# Altium PCB PCB1.PcbDoc (part 2 of 2)
Units mm, origin at the board's own origin, x right, y up, seen from the top; angles counter-clockwise.
Board outline 50 x 50 mm, 4 copper layers (Top Layer, GND, VCC, Bottom Layer), stack 1.991 mm thick; 34 components, 63 nets, 262 pads, 258 vias.
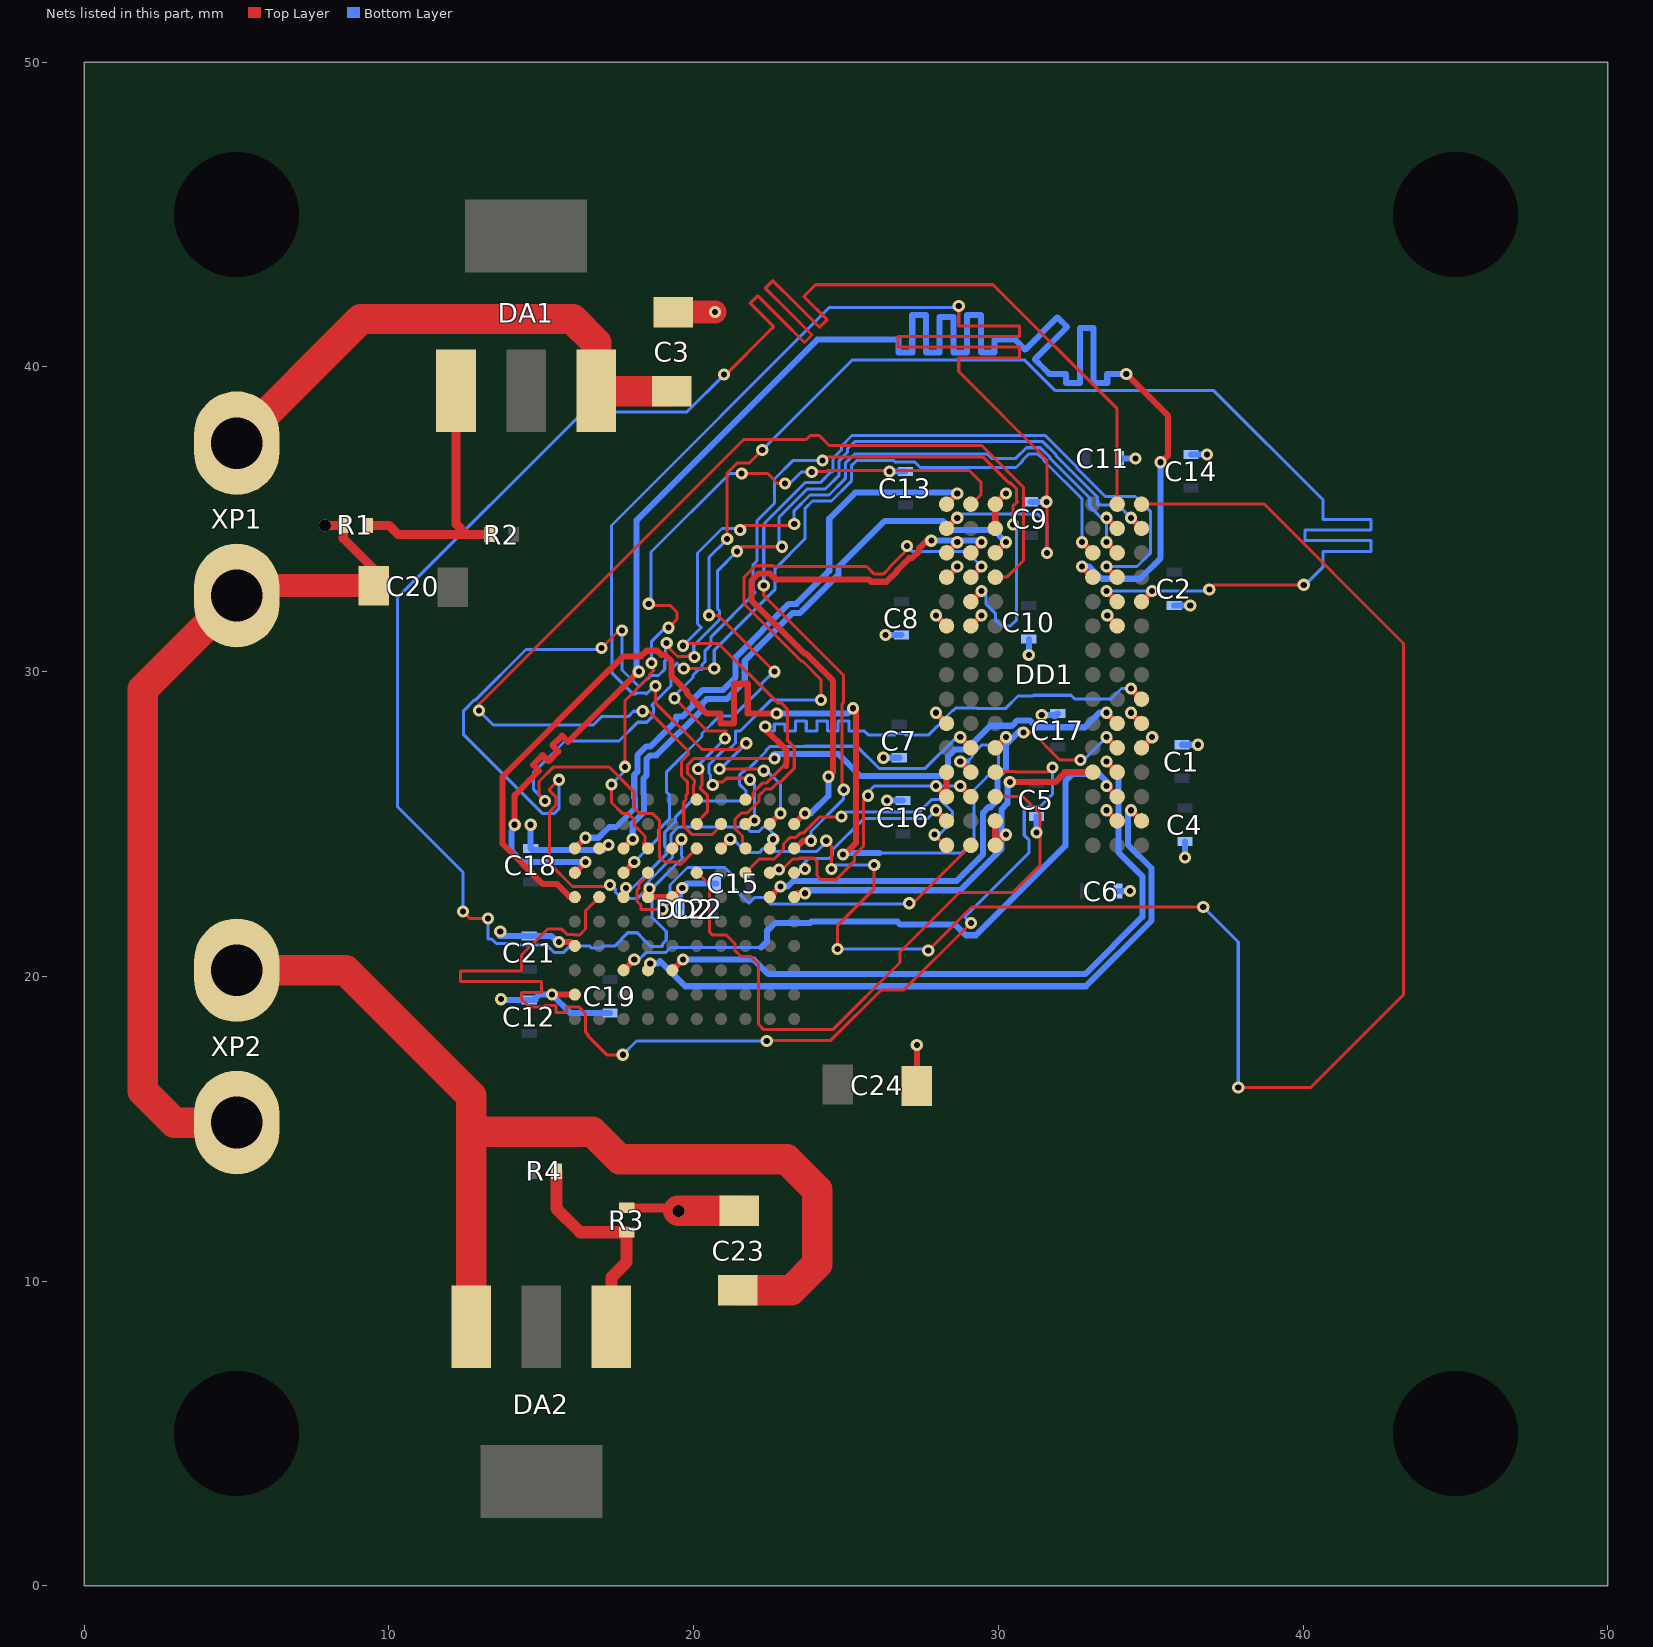
[diagram p4: the nets of this part, all layers, seen from the top]

## Via types
v1: diameter 0.4, hole 0.2, Top Layer to Bottom Layer, tented both sides, 113 vias
v2: diameter 0.4, hole 0.2, Top Layer to Bottom Layer, tented bottom, 87 vias
v3: diameter 0.4, hole 0.2, GND to Bottom Layer, tented bottom, 28 vias
v4: diameter 0.4, hole 0.2, Top Layer to GND, tented top, 14 vias
v5: diameter 0.4, hole 0.2, Top Layer to VCC, tented top, 11 vias
v6: diameter 0.4, hole 0.4, Top Layer to VCC, tented top, 2 vias
v7: diameter 0.4, hole 0.4, Top Layer to GND, tented top, 2 vias
v8: diameter 0.4, hole 0.2, Top Layer to Bottom Layer, 1 vias

## Nets (pads, with @x,y where several pads share a name; then routed paths per layer and width w, separated by ;. In a path a pad name is that pad's centre, name@x,y a point inside that pad or via, vN(x,y) a via of type N, cw(c..) or ccw(c..) an arc to the next point about the centre after c; other vN are vias at no path point) (continued)
DQ3: DD1.N8 DD2.H3 | length 21.1
  Top Layer w0.2: DD2.H3@17.7,20.2 v1(18.05,20.55) ; v1(33.55,26.25) DD1.N8@33.9,25.9
  Bottom Layer w0.1: v1(18.05,20.55) 18.205,20.55 18.431,20.776 18.721,20.776 19.077,20.776 19.251,20.95 22.216,20.95
  Bottom Layer w0.2: 22.216,20.95 22.401,21.135 22.401,21.501 22.455,21.555 22.489,21.555 22.684,21.75 23.816,21.75 23.866,21.8 26.685,21.8 26.787,21.698 28.586,21.698 28.934,21.35 29.266,21.35 32.2,24.284 32.2,26.4 32.45,26.65 33.3,26.65 33.55,26.4 v1(33.55,26.25)
DQ4: DD1.P9 DD2.H4 | length 22.5
  Top Layer w0.2: DD2.H4@18.5,20.2 18.61,20.31 18.576,20.344 v1(18.576,20.426) ; v1(34.35,25.45) DD1.P9@34.7,25.1
  Bottom Layer w0.2: v1(18.576,20.426) 18.826,20.426 18.9,20.5 19.725,19.675 32.874,19.675 35.027,21.827 35.027,23.549 34.252,24.324 34.252,25.352 v1(34.35,25.45)
DQ5: DD1.M8 DD2.H5 | length 22.6
  Top Layer w0.2: DD2.H5@19.3,20.2 v1(19.65,20.55) ; v1(33.55,27.05) DD1.M8@33.9,26.7
  Bottom Layer w0.2: v1(19.65,20.55) 21.975,20.55 22.45,20.075 32.85,20.075 34.727,21.952 34.727,23.283 33.95,24.06 33.95,26.65 v1(33.55,27.05)
DQ6: DD1.M7 DD2.E10 | length 12.6
  Top Layer w0.2: DD2.E10@23.3,22.6 23.426,22.726 v1(23.651,22.726) ; v2(30.376,26.376) 31.867,26.376 32.175,26.684 32.175,26.7 DD1.M7@33.1,26.7
  Bottom Layer w0.2: v1(23.651,22.726) 23.75,22.825 28.75,22.825 30.1,24.175 30.1,25.475 30.3,25.675 30.3,26.3 v2(30.376,26.376)
DQ7: DD1.L8 DD2.E9 | length 16.2
  Top Layer w0.1: v2@30.974,28.001 31.119,28.001 32.02,27.1 v2(32.7,27.1)
  Top Layer w0.2: DD2.E9@22.5,22.6 v1(22.85,22.95) ; v2(30.827,28.001) v2@30.974,28.001 ; v1(33.55,27.85) DD1.L8@33.9,27.5
  Bottom Layer w0.1: v2(32.7,27.1) 32.8,27.1 v1(33.55,27.85)
  Bottom Layer w0.2: v1(22.85,22.95) 23.084,22.95 23.26,23.126 24.04,23.126 24.041,23.125 28.625,23.125 29.5,24 29.5,25.375 29.675,25.55 29.74,25.55 29.976,25.786 29.976,26.542 30.25,26.815 30.25,27.599 30.726,28.076 30.801,28.001 v2(30.827,28.001)
DQ8: DD1.L2 DD2.E3 | length 15.7
  Top Layer w0.2: DD2.E3@17.7,22.6 17.783,22.683 v1(17.783,22.9) ; v1(28.75,27.85) DD1.L2@29.1,27.5
  Bottom Layer w0.1: v1(17.783,22.9) 17.992,22.9 19.1,24.008 19.1,24.224 19.051,24.273 19.051,24.729 19.373,25.051 ; 19.373,25.051 19.4,25.078 19.4,25.225 19.925,25.75 21.525,25.75 21.725,25.95 21.725,26.082 21.501,26.306 21.501,26.596 21.706,26.801 21.795,26.801 22.376,27.382 22.376,27.421 22.505,27.55 23.656,27.55 23.657,27.551 25.354,27.551 26.08,26.825 27.606,26.825 28.631,27.85 v1(28.75,27.85)
DQ9: DD1.M3 DD2.E2 | length 37.5
  Top Layer w0.1: DD2.E2@16.9,22.6 16.451,22.151 16.451,21.551 16.25,21.35 16.104,21.35 16.078,21.376 15.849,21.376 15.675,21.55 15.2,21.55 14.35,20.7 14.35,20.525 14.35,20.175 12.35,20.175 12.35,19.825 14.35,19.825 15.008,19.825 15.008,19.475 14.35,19.475 14.35,19.25 14.6,19 14.775,19 15.125,19 15.125,19.05 15.475,19.05 15.475,19 15.475,18.816 15.825,18.816 15.825,19 16.175,19 16.225,19 16.451,18.774 16.451,18.169 16.525,18.095 16.525,18.05 17.15,17.425 v1(17.675,17.425) ; v1(22.4,17.875) 22.425,17.9 24.503,17.9 26.153,19.55 26.9,19.55 v1(29.1,21.75) ; DD1.M3@29.9,26.7 29.926,26.726 30.521,26.726 30.548,26.7 31.625,26.7 v1(31.775,26.85)
  Bottom Layer w0.1: v1(17.675,17.425) 18.125,17.875 v1(22.4,17.875) ; v1(29.1,21.75) 28.902,21.948 31.001,24.048 31.001,24.479 30.85,24.63 30.85,25.462 30.938,25.55 31.35,25.55 31.775,25.975 v1(31.775,26.85)
DQ10: DD1.M2 DD2.E1 | length 37.3
  Top Layer w0.2: DD2.E1@16.1,22.6 15.926,22.6 15.926,22.616 15.516,23.026 15.049,23.026 13.726,24.349 13.726,26.551 17.25,30.075 17.265,30.075 17.675,30.485 17.675,30.5 18.267,30.5 18.454,30.687 18.806,30.687 18.949,30.544 19.074,30.544 19.276,30.341 19.276,29.983 19.276,29.85 19.776,29.35 19.776,29.286 20.437,28.625 20.875,28.625 20.875,28.3 21.325,28.3 21.325,28.625 21.325,29.602 21.775,29.602 21.775,28.625 22.225,28.625 22.45,28.625 v2(22.725,28.625) ; v2(24.901,24.001) 24.951,24.001 25.325,24.375 25.325,28.7 v2(25.225,28.8) ; v1(28.75,27.05) DD1.M2@29.1,26.7
  Bottom Layer w0.1: 26.091,24.05 28.8,24.05 29.2,24.45 29.2,26.119 30,26.919 30,27.475 29.875,27.6 29.464,27.6 29.15,27.286 29.15,27.216 28.984,27.05
  Bottom Layer w0.2: v2(22.725,28.625) 25.05,28.625 v2(25.225,28.8) ; v2(24.901,24.001) 24.95,24.05 26.091,24.05 ; v1(28.75,27.05) 28.984,27.05
DQ11: DD1.P1 DD2.D10 | length 6
  Top Layer w0.2: v1(27.95,25.45) DD1.P1@28.3,25.1
  Bottom Layer w0.1: v1@23.5,23.6 v1@23.557,23.657 ; v1(23.651,23.526) 23.651,23.563 v1@23.557,23.657 ; v1(27.95,25.45) 27.675,25.175 25.58,25.175 24.551,24.146 24.551,23.976 24.45,23.875 23.775,23.875 v1@23.557,23.657
DQ12: DD1.N2 DD2.D9 | length 9.9
  Top Layer w0.1: v1(22.8,23.51) 22.915,23.51 23.255,23.85 23.445,23.85 23.471,23.876 23.951,23.876 24.05,23.777 24.05,23.3 24.175,23.175 24.67,23.175 25.275,23.78 25.275,23.971 25.575,24.271 25.575,25.775 v1(25.726,25.926)
  Top Layer w0.2: DD2.D9@22.5,23.4 22.61,23.51 v1(22.8,23.51) ; v1(28.75,26.25) DD1.N2@29.1,25.9
  Bottom Layer w0.1: v1(25.726,25.926) 25.699,25.926 25.65,25.975 25.925,26.25 v1(28.75,26.25)
DQ13: DD1.R1 DD2.D8 | length 9.7
  Top Layer w0.1: DD2.D8@21.7,23.4 22.15,23.85 22.645,23.85 22.85,24.055 22.85,24.075 22.95,24.175 22.95,24.345 23.155,24.55 23.345,24.55 23.496,24.701 23.601,24.701 24.125,25.225 24.825,25.225 v1(24.85,25.25) ; v1(27.9,24.65) 28.25,24.3 DD1.R1@28.3,24.3
  Bottom Layer w0.1: v1(24.85,25.25) 25,25.4 27.405,25.4 27.805,25.8 28.095,25.8 28.495,25.4 28.495,25.095 28.075,24.675 27.875,24.675 v1(27.9,24.65)
DQ14: DD1.N3 DD2.D6 | length 21.4
  Top Layer w0.1: DD2.D6@20.1,23.4 20.125,23.4 20.525,23 20.525,21.45 20.625,21.35 21.075,21.35 21.35,21.075 21.35,20.855 21.555,20.65 21.875,20.65 22.125,20.4 22.125,18.425 22.3,18.25 24.57,18.25 26.775,20.455 26.775,20.8 28.725,22.75 30.475,22.75 31.375,23.65 31.375,25.325 30.8,25.9 DD1.N3@29.9,25.9
DQ15: DD1.R2 DD2.D4 | length 14.8
  Top Layer w0.1: DD2.D4@18.5,23.4 18.5,23.32 18.2,23.02 18.2,22.888 18.133,22.821 18.133,22.472 18.274,22.331 18.274,22.201 v1(18.976,22.201) ; v8(27.075,22.4) 27.2,22.4 DD1.R2@29.1,24.3
  Bottom Layer w0.1: v1(18.976,22.201) 18.999,22.201 19,22.2 19.225,22.425 19.225,23 19.8,23.575 21.025,23.575 21.275,23.325 21.275,22.94 21.815,22.4 22.007,22.591 22.296,22.591 22.512,22.376 27.051,22.376 v8(27.075,22.4)
DQ16: DD1.E8 DD2.D3 | length 57.4
  Top Layer w0.1: v2(20.5,31.85) 20.8,31.85 v2(22.65,30) ; v2(21.1,34.35) 21.1,36.521 21.431,36.852 21.721,36.852 ; 21.721,36.851 21.826,36.851 v2(22.25,37.275) ; v2(36.925,32.7) 37.075,32.85 v2(40.025,32.85)
  Top Layer w0.2: DD2.D3@17.7,23.4 v1(18.05,23.75) ; v1(33.55,32.65) DD1.E8@33.9,32.3
  Bottom Layer w0.1: v1(18.05,23.75) 18.851,24.551 18.851,24.812 19.2,25.161 19.2,25.957 19.101,26.056 19.101,26.696 20.276,27.871 20.276,27.971 20.857,28.551 21.318,28.551 22.226,29.459 22.226,29.601 22.625,30 v2(22.65,30) ; v2(20.5,31.85) 20.5,33.75 v2(21.1,34.35) ; v2(22.25,37.275) 25.2,40.225 30.871,40.225 31.871,39.225 37.075,39.225 40.65,35.65 40.65,35 42.227,35 42.227,34.65 40.65,34.65 40.073,34.65 40.073,34.3 40.65,34.3 42.227,34.3 42.227,33.95 40.65,33.95 40.65,33.6 40.65,33.425 40.075,32.85 v2(40.025,32.85) ; v1(33.55,32.65) 36.875,32.65 v2(36.925,32.7)
DQ17: DD1.D7 DD2.D1 | length 61.5
  Top Layer w0.2: v2(14.126,24.976) 14.126,25.951 14.285,26.11 14.603,26.428 14.921,26.746 14.726,26.941 15.044,27.259 15.239,27.064 15.558,27.383 15.363,27.577 15.681,27.896 15.876,27.701 16.375,28.2 18.175,30 v2(18.2,30) ; DD2.D1@16.1,23.4 v1(16.45,23.75) ; v1(32.75,33.45) DD1.D7@33.1,33.1 ; v2(34.2,39.775) 35.575,38.4 35.575,37.1 35.35,36.875 v2(35.325,36.875)
  Bottom Layer w0.2: v2(14.126,24.976) 14.174,24.976 14.2,24.95 14.025,24.775 14.025,24.1 14.375,23.75 v1(16.45,23.75) ; v2(18.2,30) 18.126,30.074 18.126,34.976 24.05,40.9 26.325,40.9 26.725,40.9 26.725,40.475 27.175,40.475 27.175,40.9 27.175,41.7 27.625,41.7 27.625,40.9 27.625,40.475 28.075,40.475 28.075,40.9 28.075,41.64 28.525,41.64 28.525,40.9 28.525,40.475 28.975,40.475 28.975,40.9 28.975,41.71 29.425,41.71 29.425,40.9 29.425,40.475 29.875,40.475 29.875,40.9 30.325,40.9 30.55,40.9 30.561,40.889 30.88,40.57 31.94,41.631 32.258,41.313 31.198,40.252 31.516,39.934 31.675,39.775 31.775,39.775 32.225,39.775 32.225,39.475 32.675,39.475 32.675,39.775 32.675,41.275 33.125,41.275 33.125,39.775 33.125,39.475 33.575,39.475 33.575,39.775 33.8,39.775 v2(34.2,39.775) ; v1(32.75,33.45) 32.984,33.45 33.384,33.05 34.65,33.05 35.325,33.725 v2(35.325,36.875)
DQ18: DD1.D8 DD2.C10 | length 31.4
  Top Layer w0.1: v2(22.301,32.827) 22.301,32.499 24.925,29.875 24.925,28.995 24.875,28.945 24.875,26.175 v2(24.925,26.125)
  Top Layer w0.2: DD2.C10@23.3,24.2 23.349,24.2 23.6,24.451 v1(23.851,24.451) ; v1(33.55,33.45) DD1.D8@33.9,33.1
  Bottom Layer w0.1: v2(22.301,32.827) 22.301,34.751 22.375,34.825 22.325,34.875 23.652,36.202 24.152,36.202 24.527,36.577 24.576,36.577 24.576,37.006 24.85,37.28 24.85,37.4 25.2,37.75 31.544,37.75 32.575,36.718 32.575,36.688 33.513,35.75 34.5,35.75 35,35.25 35,33.9 34.55,33.45 v1(33.55,33.45) ; v1(23.851,24.451) 23.851,24.751 24.925,25.825 v2(24.925,26.125)
DQ19: DD1.B9 DD2.C9 | length 52.4
  Top Layer w0.1: v2(15.575,26.45) 15.275,26.15 15.275,26.095 15.475,25.895 15.475,25.605 15.275,25.405 15.275,23.7 16.025,22.95 17.2,22.95 v2(17.251,23.001) ; v1(16.975,30.775) 17.55,31.35 v1(17.65,31.35) ; v1(19.115,30.944) 19.071,30.9 19.471,30.5 19.795,30.5 19.87,30.575 19.975,30.575 20.026,30.524 v1(20.026,30.476) ; v2(21.425,33.95) 21.575,34.1 v2(22.9,34.1)
  Top Layer w0.2: DD2.C9@22.5,24.2 22.61,24.31 v1(22.61,24.5) ; v1(34.35,35.05) DD1.B9@34.7,34.7
  Bottom Layer w0.1: v2(15.575,26.45) 15.575,25.5 15.425,25.35 15.03,25.35 12.45,27.93 12.45,28.72 12.805,29.075 12.85,29.075 14.5,30.725 16.925,30.725 v1(16.975,30.775) ; v2(17.251,23.001) 17.275,23.025 17.433,22.867 17.433,22.755 17.638,22.55 18.145,22.55 18.4,22.805 18.4,23 19.3,23.9 19.3,24.307 19.251,24.356 19.251,24.646 19.456,24.851 19.505,24.9 21.715,24.9 21.855,24.76 22.145,24.76 22.285,24.9 22.4,24.9 22.75,24.55 22.7,24.5 v1(22.61,24.5) ; v1(17.65,31.35) 17.65,30.055 18.205,29.5 18.469,29.764 18.493,29.764 18.606,29.876 18.846,29.876 19.051,30.082 19.051,30.346 19.075,30.37 19.075,30.904 v1(19.115,30.944) ; v1(20.026,30.476) 20.002,30.5 20.002,30.857 20.85,31.705 20.85,31.995 20.775,32.07 20.775,33.3 v2(21.425,33.95) ; v2(22.9,34.1) 22.8,34.2 22.8,35.067 23.735,36.002 24.327,36.002 24.776,36.451 24.776,36.923 25.05,37.197 25.05,37.317 25.283,37.55 31.461,37.55 31.9,37.111 31.9,37.08 33.25,35.73 33.25,35.475 33.925,35.475 v1(34.35,35.05)
DQ20: DD1.C8 DD2.C8 | length 31.5
  Top Layer w0.1: v2(19.65,30.85) 19.725,30.925 20.806,30.925 22.756,28.975 22.87,28.975 23.075,28.77 23.075,27.746 23.301,27.52 23.301,26.832 22.81,26.34 22.735,26.34 22.545,26.15 22.355,26.15 22.15,25.945 22.15,25.755 21.755,25.36 21.565,25.36 21.35,25.145 21.35,24.855 21.6,24.605 21.6,24.3 DD2.C8@21.7,24.2 ; v2(21.526,34.652) 21.674,34.8 23.25,34.8 v2(23.3,34.85)
  Top Layer w0.2: v1(33.55,34.25) DD1.C8@33.9,33.9
  Bottom Layer w0.1: v2(19.65,30.85) 20.25,31.45 20.125,31.575 20.125,33.896 20.929,34.7 21.478,34.7 v2(21.526,34.652) ; v2(23.3,34.85) 23.3,35.284 23.817,35.802 24.444,35.802 24.976,36.334 24.976,36.841 25.281,37.146 29.629,37.146 29.775,37 30.572,37 30.922,37.35 31.378,37.35 31.7,37.028 31.7,36.997 33,35.697 33,35.425 33.55,34.875 v1(33.55,34.25)
DQ21: DD1.A9 DD2.C7 | length 57.5
  Top Layer w0.1: v2(24.351,24.451) 24.525,24.277 v2(24.525,23.525) ; v2(24.725,20.9) 24.725,21.675 25.925,22.875 v2(25.925,23.65) ; v2(27.7,20.85) 29.125,22.275 v2(36.725,22.275) ; DD1.A9@34.7,35.5 38.725,35.5 43.3,30.925 43.3,19.4 40.25,16.35 v2(37.875,16.35)
  Top Layer w0.2: DD2.C7@20.9,24.2 v1(21.201,24.501)
  Bottom Layer w0.1: v1(21.201,24.501) 21.299,24.501 21.74,24.06 22.148,24.06 22.288,24.2 22.415,24.2 22.514,24.101 24.051,24.101 24.351,24.401 v2(24.351,24.451) ; v2(24.525,23.525) 24.65,23.65 v2(25.925,23.65) ; v2(24.725,20.9) 27.55,20.9 27.6,20.95 v2(27.7,20.85) ; v2(36.725,22.275) 37.875,21.125 v2(37.875,16.35)
DQ22: DD1.C7 DD2.C6 | length 37.3
  Top Layer w0.1: v2(15.125,25.75) 14.925,25.95 14.925,26.396 15.404,26.875 17.22,26.875 18.05,26.045 18.05,25.525 18.225,25.35 18.645,25.35 18.875,25.12 18.875,23.925 19.05,23.75 19.445,23.75 19.52,23.675 19.575,23.675 DD2.C6@20.1,24.2 ; v2(19.676,30.101) 20.526,30.101 20.601,30.176 v2(20.676,30.101)
  Top Layer w0.2: v1(32.75,34.25) DD1.C7@33.1,33.9
  Bottom Layer w0.1: v2(15.125,25.75) 14.75,26.125 14.75,26.7 15.776,27.726 17.546,27.726 18.16,28.34 18.459,28.34 18.676,28.556 18.676,28.849 18.625,28.9 18.625,28.906 19.251,29.531 19.251,30.076 19.451,30.276 19.626,30.101 v2(19.676,30.101) ; v2(20.676,30.101) 20.676,30.707 22.675,32.706 22.675,33.38 23.65,34.355 23.65,35.351 23.9,35.602 24.527,35.602 25.176,36.251 25.176,36.758 25.343,36.925 26.57,36.925 26.629,36.866 26.638,36.875 27.262,36.875 27.437,36.7 30.583,36.7 30.8,36.917 30.8,36.945 31.005,37.15 31.295,37.15 31.5,36.945 31.5,36.914 32.75,35.664 v1(32.75,34.25)
DQ23: DD1.A8 DD2.C5 | length 65.3
  Top Layer w0.1: v2(12.425,22.125) 12.65,21.9 v2(13.25,21.9) ; v2(21,39.75) 21,39.7 22.5,41.2 22.624,41.324 21.858,42.09 22.105,42.337 22.871,41.571 23.637,40.805 23.885,41.053 23.119,41.819 22.353,42.585 22.6,42.832 23.366,42.066 24.132,41.3 24.38,41.548 23.614,42.314 24,42.7 29.825,42.7 33.9,38.625 DD1.A8@33.9,35.5
  Top Layer w0.2: DD2.C5@19.3,24.2 v1(19.601,24.501)
  Bottom Layer w0.1: v2(12.425,22.125) 12.425,23.425 10.275,25.575 10.275,32.425 16.375,38.525 19.775,38.525 v2(21,39.75) ; v2(13.25,21.9) 13.25,21.225 13.371,21.225 13.521,21.075 14.2,21.075 14.25,21.025 15.182,21.025 15.431,20.776 15.721,20.776 15.945,21 16.582,21 16.656,20.926 16.946,20.926 17.02,21 17.425,21 17.626,21.201 17.626,21.221 17.835,21.43 18.145,21.43 18.35,21.225 18.35,21.214 18.588,20.976 18.804,20.976 18.971,20.976 18.971,21.051 19.101,21.181 19.101,21.471 18.626,21.946 18.626,22.876 19.65,23.9 19.601,23.949 v1(19.601,24.501)
DQ24: DD1.A2 DD2.C4 | length 25.8
  Top Layer w0.1: v1(17.3,26.3) 17.3,25.705 17.655,25.35 17.845,25.35 18.05,25.145 18.05,24.955 18.4,24.605 18.4,24.405 18.347,24.353 DD2.C4@18.5,24.2 ; v1(17.751,26.876) 17.751,29.056 18.55,29.855 18.55,29.9 18.701,30.051 18.62,30.132 v1(18.62,30.287) ; v1(18.526,32.227) 18.526,32.224 18.575,32.175 19.225,32.175 19.454,31.946 19.454,31.721 v1(19.176,31.444) ; v1(21.576,36.502) 22.427,36.502 22.752,36.177 v1(23.001,36.177) ; v1(23.876,36.552) 23.823,36.552 23.798,36.577 24.371,36.577 24.394,36.6 29.05,36.6 29.425,36.225 29.425,35.8 29.125,35.5 DD1.A2@29.1,35.5
  Bottom Layer w0.1: v1(17.3,26.3) 17.675,26.675 17.675,26.8 v1(17.751,26.876) ; v1(18.526,32.227) 18.6,32.152 18.6,33.925 21.175,36.5 21.597,36.5 v1@21.599,36.501 ; v1(18.62,30.287) 18.62,30.995 19.069,31.444 v1(19.176,31.444) ; v1(21.576,36.502) v1@21.598,36.502 ; v1(23.001,36.177) 23.152,36.177 23.527,36.552 v1(23.876,36.552)
DQ25: DD1.C3 DD2.C3 | length 19.7
  Top Layer w0.2: DD2.C3@17.7,24.2 v1(18.001,24.501) ; DD1.C3@29.9,33.9 v1(30.25,34.25)
  Bottom Layer w0.2: v1(18.001,24.501) 18.001,25.027 18.375,25.401 18.375,25.962 18.351,25.986 18.351,26.486 18.451,26.586 18.451,27.127 18.574,27.25 18.772,27.25 20.276,28.754 20.276,28.952 20.426,29.101 21.09,29.101 21.676,29.687 21.676,30.352 23.251,31.927 23.491,31.927 24.75,33.186 24.75,33.426 26.274,34.95 28.184,34.95 28.484,34.65 29.85,34.65 v1(30.25,34.25)
DQ26: DD1.A1 DD2.C1 | length 20.5
  Top Layer w0.2: DD2.C1@16.125,24.2 DD2.C1@16.1,24.2 v1(16.45,24.55) ; DD1.A1@28.3,35.5 v1(28.65,35.85)
  Bottom Layer w0.2: v1(16.45,24.55) 16.876,24.55 16.95,24.624 17.227,24.901 17.451,24.901 18.075,25.525 18.075,25.837 18.051,25.861 18.051,26.611 18.151,26.711 18.151,27.251 18.45,27.55 18.589,27.55 19.426,28.387 19.426,28.526 ; 19.426,28.526 19.624,28.526 19.976,28.878 19.976,29.076 20.301,29.401 20.966,29.401 21.376,29.812 21.376,30.476 23.127,32.227 23.367,32.227 24.45,33.31 24.45,35.025 25.3,35.875 28.625,35.875 v1(28.65,35.85)
DQ27: DD1.C2 DD2.B10 | length 18.7
  Top Layer w0.2: DD2.B10@23.3,25 v1(23.65,25.35) ; v2(24.425,26.55) 24.575,26.7 24.575,29.699 23.674,30.6 23.634,30.6 21.901,32.333 21.901,32.992 22.135,33.227 22.501,33.227 22.701,33.027 25.75,33.027 25.826,32.95 26.324,32.95 26.675,33.301 26.675,33.325 27.075,33.725 27.166,33.725 27.4,33.959 27.4,34.05 27.65,34.3 v2(27.8,34.3) ; DD1.C2@29.1,33.9 v1(29.45,34.25)
  Bottom Layer w0.2: v1(23.65,25.35) 23.85,25.35 24.425,25.925 v2(24.425,26.55) ; v2(27.8,34.3) 29.4,34.3 v1(29.45,34.25)
DQ28: DD1.B1 DD2.B9 | length 56.1
  Top Layer w0.1: v2(18.751,29.526) 18.751,29.026 18.725,29 20.274,27.451 21.451,27.451 21.651,27.651 v2(21.726,27.651) ; v2(20.851,26.801) 22.199,26.801 22.224,26.826 v2(22.3,26.75) ; v2(28.7,42) 28.7,41.525 28.7,41.35 30.7,41.35 30.7,41 28.7,41 26.7,41 26.7,40.65 28.7,40.65 30.7,40.65 30.7,40.3 28.7,40.3 28.7,39.95 28.7,39.85 28.824,39.726 28.825,39.725 31.6,36.95 v2(31.6,33.9)
  Top Layer w0.2: DD2.B9@22.5,25 v1(22.85,25.35) ; DD1.B1@28.3,34.7 v1(28.65,35.05)
  Bottom Layer w0.1: v2(18.751,29.526) 18.701,29.526 18.45,29.275 18.445,29.275 18.42,29.3 18.13,29.3 18.105,29.275 18,29.275 17.325,29.95 17.325,31.18 17.3,31.205 17.3,34.8 24.45,41.95 28.65,41.95 v2(28.7,42) ; v2(20.851,26.801) 20.876,26.801 v2(21.726,27.651) ; v2(22.3,26.75) 22.4,26.75 22.85,26.3 v1(22.85,25.35) ; v1(28.65,35.05) 28.777,35.177 31.298,35.177 31.6,34.875 v2(31.6,33.9)
DQ29: DD1.D2 DD2.B8 | length 23.3
  Top Layer w0.1: v2(20.626,26.276) 20.551,26.276 20.652,26.377 20.957,26.377 21.081,26.501 21.801,26.501 v2(21.851,26.451) ; v2(24.175,29.075) 24.175,29.745 23.57,30.35 23.531,30.35 21.651,32.23 21.651,33.096 22.032,33.477 22.604,33.477 22.631,33.45 25.68,33.45 25.93,33.2 26.22,33.2 26.425,33.405 26.425,33.429 27,34.004 v2(27,34.125)
  Top Layer w0.2: DD2.B8@21.7,25 21.81,25.11 v1(22,25.11) ; DD1.D2@29.1,33.1 v1(29.45,33.45)
  Bottom Layer w0.1: v2(20.626,26.276) 20.624,26.276 20.55,26.202 20.55,26.607 20.501,26.656 20.501,26.946 21.006,27.451 21.171,27.451 21.376,27.656 21.376,28.044 21.384,28.051 21.525,28.051 22.549,29.075 v2(24.175,29.075) ; v2(21.851,26.451) 22,26.302 v1(22,25.11) ; v2(27,34.125) 27.175,33.95 28.95,33.95 v1(29.45,33.45)
DQ30: DD1.D3 DD2.B7 | length 38
  Top Layer w0.1: v1(12.95,28.725) 12.95,28.925 21.65,37.625 23.704,37.625 23.831,37.752 24.121,37.752 24.448,37.425 29.453,37.425 30.826,36.051 30.826,33.651 30.275,33.1 DD1.D3@29.9,33.1 ; v1(18.326,28.701) 18.524,28.701 19.826,27.399 19.826,27.279 19.601,27.054 19.601,26.573 19.801,26.373 19.801,25.996 19.75,25.945 19.75,25.8 19.675,25.725 19.675,24.93 19.955,24.65 20.6,24.65 20.9,24.95 DD2.B7@20.9,25
  Bottom Layer w0.1: v1(12.95,28.725) 13.425,28.25 16.7,28.25 16.975,28.525 17.85,28.525 18.026,28.701 v1(18.326,28.701)
DQ31: DD1.E2 DD2.B6 | length 30.2
  Top Layer w0.1: v1@19.312,29.188 v1@19.374,29.126 ; v1(19.376,29.126) v1@19.374,29.126 ; DD2.B6@20.1,25 20.1,25.05 20.45,25.4 20.45,25.945 20.201,26.194 20.275,26.268 v1@20.275,26.725 ; v1(21.026,27.801) 21.026,28.001 21.075,28.05 20.45,28.05 v1@19.374,29.126 ; v1(24.226,36.927) 24.226,37.024 24.2,37.05 29.492,37.05 30.342,36.2 30.395,36.2 30.6,35.995 30.6,35.603 30.626,35.576 30.476,35.426 v1(30.476,34.827)
  Top Layer w0.2: DD1.E2@29.1,32.3 v1(29.45,32.65)
  Bottom Layer w0.1: v1@19.251,29.249 19.252,29.25 v1@19.335,29.168 ; v1(19.376,29.126) v1@19.335,29.168 ; v1(20.151,26.801) 20.151,26.926 v1(21.026,27.801) ; v1(24.226,36.927) 23.256,36.927 22.65,36.321 22.65,35.53 22.076,34.956 22.076,33.643 21.951,33.518 21.951,32.682 22.016,32.616 22.016,32.589 20.575,31.147 20.575,30.888 20.376,30.689 20.376,30.332 20.275,30.231 20.275,30.075 20.171,30.075 19.975,29.879 19.975,29.808 v1@19.335,29.168 ; v1(29.45,32.65) 29.6,32.5 29.6,32.217 29.9,31.917 29.9,31.705 30.105,31.5 30.395,31.5 30.6,31.705 30.6,31.995 v1@30.6,34.675
DQM0: DD1.K9 | length 0.5
  Top Layer w0.2: v1(34.35,28.65) DD1.K9@34.7,28.3
DQM1: DD1.K1 | length 0.5
  Top Layer w0.2: v1(27.95,28.65) DD1.K1@28.3,28.3
DQM2: DD1.F8 | length 0.5
  Top Layer w0.2: v1(33.575,31.85) DD1.F8@33.925,31.5
DQM3: DD1.F2 | length 0.5
  Top Layer w0.2: DD1.F2@29.1,31.5 v1(29.45,31.85)
GND: C1.2 C2.2 C3.2 C4.2 C5.2 C6.2 C7.2 C8.2 C9.2 C10.2 C11.2 C12.2 C13.2 C14.2 C15.2 C16.2 C17.2 C18.2 C19.2 C20.2 C21.2 C22.2 C23.2 C24.2 DD1.A3 DD1.B3 DD1.B8 DD1.C1 DD1.D1 DD1.E9 DD1.F1 DD1.L3 DD1.L9 DD1.M1 DD1.N1 DD1.P3 DD1.P8 DD1.R3 DD2.C2 DD2.E4 DD2.E5 DD2.G1 DD2.J1 R1.1 R3.1 XP1.2 XP2.2 | length 64.9
  Top Layer w0.2: v1(15.35,19.4) DD2.J1@16.1,19.4 ; v1(15.576,21.126) 15.974,21.126 DD2.G1@16.1,21 ; DD2.C2@16.9,24.2 17.091,24.2 v1(17.2,24.309) ; v4(18.551,22.876) 18.526,22.876 18.45,22.8 18.45,22.784 18.383,22.717 DD2.E4@18.5,22.6 18.501,22.601 19.299,22.601 DD2.E5@19.3,22.6 19.325,22.6 v2(19.625,22.9) ; C24.2@27.325,16.4 v4(27.325,17.75) ; v4(27.95,26.25) DD1.N1@28.3,25.9 DD1.M1@28.3,26.7 ; v4(27.95,31.85) DD1.F1@28.3,31.5 ; DD1.D1@28.3,33.1 v4(28.65,33.45) ; DD1.C1@28.3,33.9 v4(28.65,34.25) ; DD1.P3@29.9,25.1 DD1.R3@29.9,24.3 v4(30.25,24.65) ; DD1.L3@29.9,27.5 v4(30.25,27.85) ; DD1.B3@29.9,34.7 DD1.A3@29.9,35.5 v4(30.25,35.85) ; v4(33.55,25.45) DD1.P8@33.9,25.1 ; v4(33.55,35.05) DD1.B8@33.9,34.7 ; DD1.L9@34.7,27.5 v4(35.05,27.85) ; DD1.E9@34.7,32.3 v4(35.05,32.65)
  Top Layer w0.3: v7(7.9,34.8) R1.1@8.5,34.8 8.5,34.375 9.5,33.375 C20.2@9.5,32.825 ; R3.1@17.8,12.4 19.4,12.4 v7(19.5,12.3)
  Top Layer w0.75: XP1.2@5,32.5 5.7,32.5 6.025,32.825 C20.2@9.5,32.825 ; C3.2@19.325,41.8 v4(20.7,41.8)
  Top Layer w1: XP2.2@5,15.2 2.95,15.2 1.925,16.225 1.925,29.425 XP1.2@5,32.5 ; v7(19.5,12.3) C23.2@21.5,12.3
  Bottom Layer w0.2: v3@13.625,21.325 C21.2@14.6,21.325 15.325,21.325 15.524,21.126 v1(15.576,21.126) ; v3@13.65,19.225 C12.2@14.6,19.225 ; C12.2@14.625,19.225 C12.2@14.6,19.225 ; v3(14.65,24.975) C18.2@14.65,24.2 14.7,24.15 17.041,24.15 v1(17.2,24.309) ; C19.2@17.25,18.8 15.95,18.8 v1(15.35,19.4) 14.925,19.4 14.8,19.275 14.8,19.225 C12.2@14.6,19.225 ; C22.2@19.55,22.225 19.55,22.825 v2(19.625,22.9) 19.775,23.05 C15.2@20.75,23.05 ; v3(26.225,27.175) C7.2@26.75,27.175 ; v3(26.3,31.2) C8.2@26.825,31.2 ; v3(26.35,25.775) C16.2@26.875,25.775 ; v3(26.425,36.575) C13.2@26.95,36.575 ; v3(31,30.55) C10.2@31,31.075 ; C9.2@31.05,35.575 v3(31.575,35.575) ; v3(31.25,24.725) C5.2@31.25,25.25 ; v3(31.427,28.576) 31.801,28.576 31.851,28.526 C17.2@31.95,28.625 ; C6.2@33.925,22.8 C6.2@33.925,22.8 v3(34.327,22.801) ; C11.2@33.975,37 v3(34.5,37) ; C2.2@35.775,32.175 v3(36.3,32.175) ; C1.2@36.025,27.6 v3(36.55,27.6) ; v3(36.125,23.9) C4.2@36.125,24.425 ; C14.2@36.325,37.125 v3(36.85,37.125)
  other v3: 13.675,19.25 13.651,21.476
NetC3_1: C3.1 DA1.3 XP1.1 | length 17.9
  Top Layer w1: XP1.1@5,37.5 9.075,41.575 16.025,41.575 16.8,40.8 DA1.3@16.8,39.22 16.82,39.2 C3.1@19.275,39.2
NetC23_1: C23.1 DA2.3 XP2.1 | length 34.5
  Top Layer w1: XP2.1@5,20.2 8.575,20.2 12.7,16.075 12.7,14.95 ; DA2.3@12.7,8.5 12.7,14.95 ; C23.1@21.45,9.7 23.2,9.7 24.05,10.55 24.05,13 23.05,14 17.575,14 16.675,14.9 12.75,14.9 12.7,14.95
NetDA1_1: DA1.1 R1.2 R2.2 | length 9
  Top Layer w0.3: R1.2@9.3,34.8 10,34.8 10.3,34.5 12.55,34.5 ; DA1.1@12.2,39.22 12.2,34.85 12.55,34.5 ; R2.2@13.3,34.5 12.55,34.5
NetDA2_1: DA2.1 R3.2 R4.2 | length 7.2
  Top Layer w0.4: R4.2@15.5,13.6 15.5,12.375 16.275,11.6 R3.2@17.8,11.6 17.8,10.625 17.3,10.125 DA2.1@17.3,8.5
RAS: DD1.J9 DD2.A8 | length 19.3
  Top Layer w0.1: DD2.A8@21.7,25.8 21.845,25.8 21.95,25.905 21.95,26.028 22.272,26.35 22.395,26.35 22.955,26.91 23.026,26.91
  Top Layer w0.2: v2(22.351,28.201) 22.351,28.117 23.051,27.417 23.051,26.986 23.026,26.961 23.026,26.91 ; v1(34.35,29.45) DD1.J9@34.7,29.1
  Bottom Layer w0.1: v2(22.351,28.201) 22.351,28.174 22.47,28.055 22.645,28.055 22.645,28.275 22.995,28.275 22.995,28.055 23.345,28.055 23.345,28.375 23.695,28.375 23.695,28.055 24.045,28.055 24.045,28.375 24.395,28.375 24.395,28.055 24.745,28.055 24.745,28.375 25.095,28.375 25.095,28.055 25.445,28.055 25.6,28.055 25.73,27.925 25.905,27.925 26.255,27.925 26.605,27.925 26.605,27.975 26.955,27.975 26.955,27.925 27.305,27.925 27.655,27.925 27.675,27.925 27.72,27.925 28.3,28.505 28.3,28.529 28.496,28.725 28.52,28.725 28.595,28.8 29.296,28.8 29.301,28.795 30.243,28.795 30.649,29.2 31.131,29.2 31.157,29.226 32.385,29.226 32.511,29.1 33.695,29.1 34.045,29.45 v1(34.35,29.45)
WE: DD1.K8 DD2.A6 | length 17.4
  Top Layer w0.1: DD2.A6@20.1,25.8 19.994,25.906 20.026,25.938 20.026,25.949 20.001,25.973 20.001,26.283 20.026,26.308 20.026,26.431 19.801,26.656 19.801,26.946 20.006,27.151 v2(22.651,27.151)
  Top Layer w0.2: v1(33.55,28.65) DD1.K8@33.9,28.3
  Bottom Layer w0.2: v2(22.651,27.151) 22.651,27.251 22.626,27.276 22.65,27.3 23.759,27.3 23.76,27.301 24.749,27.301 25.475,26.575 28.125,26.575 28.35,26.8 28.35,27.216 28.584,27.45 28.96,27.45 29.735,28.225 30.451,28.225 30.628,28.401 31.036,28.401 31.261,28.176 32.842,28.176 33.316,28.65 v1(33.55,28.65)
pads on no net: DD1.E3 DD1.E7 DD1.H3 DD1.H7 DD1.K2 DD1.K3 DD2.A1 DD2.A2 DD2.A3 DD2.B3 DD2.B4 DD2.B5 DD2.D7 DD2.E8 DD2.F6 DD2.H6 DD2.H7 DD2.H8 DD2.H9 DD2.H10 DD2.J2 DD2.J3 DD2.J4 DD2.J5 DD2.J6 DD2.J7 DD2.J8 DD2.J9 DD2.J10 DD2.K2 DD2.K3 DD2.K4 DD2.K5 DD2.K6 DD2.K7 DD2.K8 DD2.K9 DD2.K10

## Polygon pours and split planes (outlines as drawn)
+3V3 on Top Layer "Top Overlay-No Net" (solid, remove dead copper, pour order 0): 13.625,36.925 13.625,33.975 13.3,33.65 11.45,33.65 11.075,33.275 11.075,31.35 11.825,30.6 14.4,30.6 16.2,32.4 16.2,36.925
GND on Bottom Layer "GND_L04_P002" (solid, remove dead copper, pour order 2): 0,0 50,0 50,50 0,50
GND on GND (split plane): 49.49,0.51 0.51,0.51 0.51,49.49 49.49,49.49
+3V3 on VCC (split plane): 49.49,0.51 0.51,0.51 0.51,49.49 49.49,49.49

## Keep-outs
Keep-Out Layer:
  rectangle: 42.5,42.5 47.5,47.5
  rectangle: 42.5,2.5 47.5,7.5
  rectangle: 2.5,2.5 7.5,7.5
  rectangle: 2.5,42.5 7.5,47.5
  rectangle: 0,0 0.5,50
  rectangle: 0,49.5 50,50
  rectangle: 49.5,0 50,50
  rectangle: 0,0 50.5,0.5

## Silkscreen, mask and mechanical layers (free items; w line width, h text height)
Board:
  the board outline again, w0.254

## Text inside footprints (layer, text, board x,y; h text height)
XP1: Top Overlay "GND" at 7.54,32.166 h1; Top Overlay "VCC" at 7.667,37.5 h1
XP2: Top Overlay "GND" at 7.54,14.866 h1; Top Overlay "VCC" at 7.667,20.2 h1